# Altium PCB PCB1.PcbDoc
Units mil, origin at the board's own origin, x right, y up, seen from the top; angles counter-clockwise.
Board outline 5486 x 3258 mil, 2 copper layers (Top Layer, Bottom Layer); 90 components, 84 nets, 319 pads, 0 vias.
Unrouted connection lines stored in the file: 3.
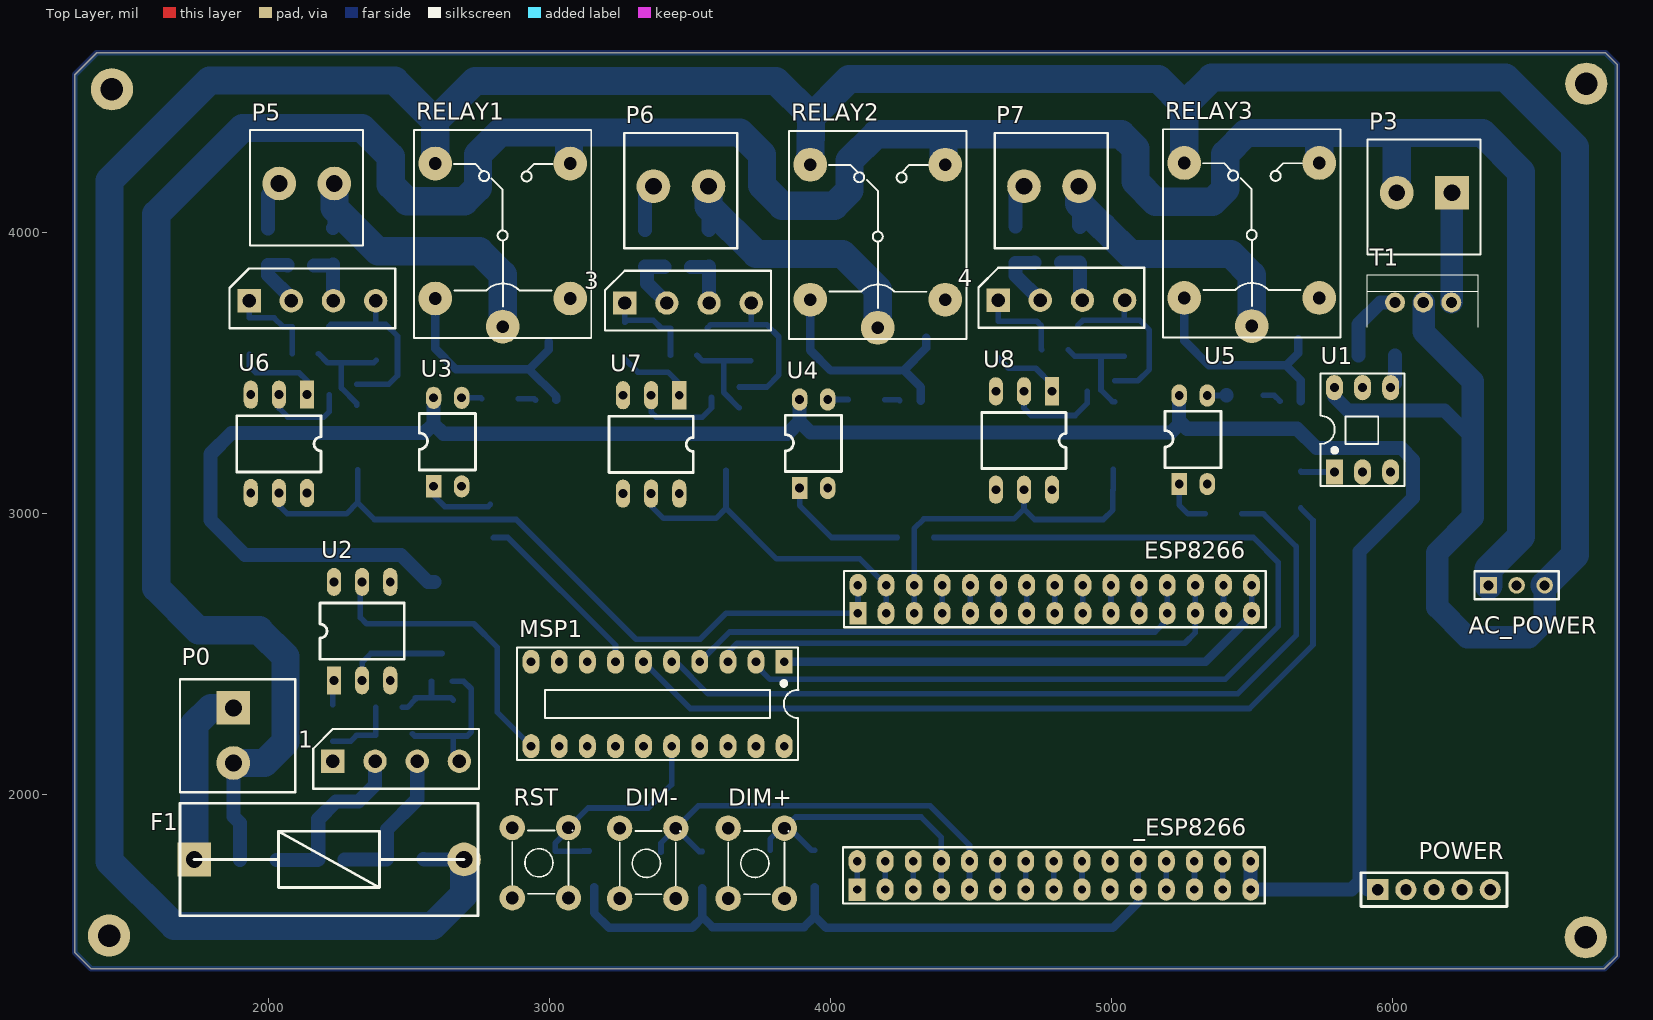
[diagram p0: Top Layer view]
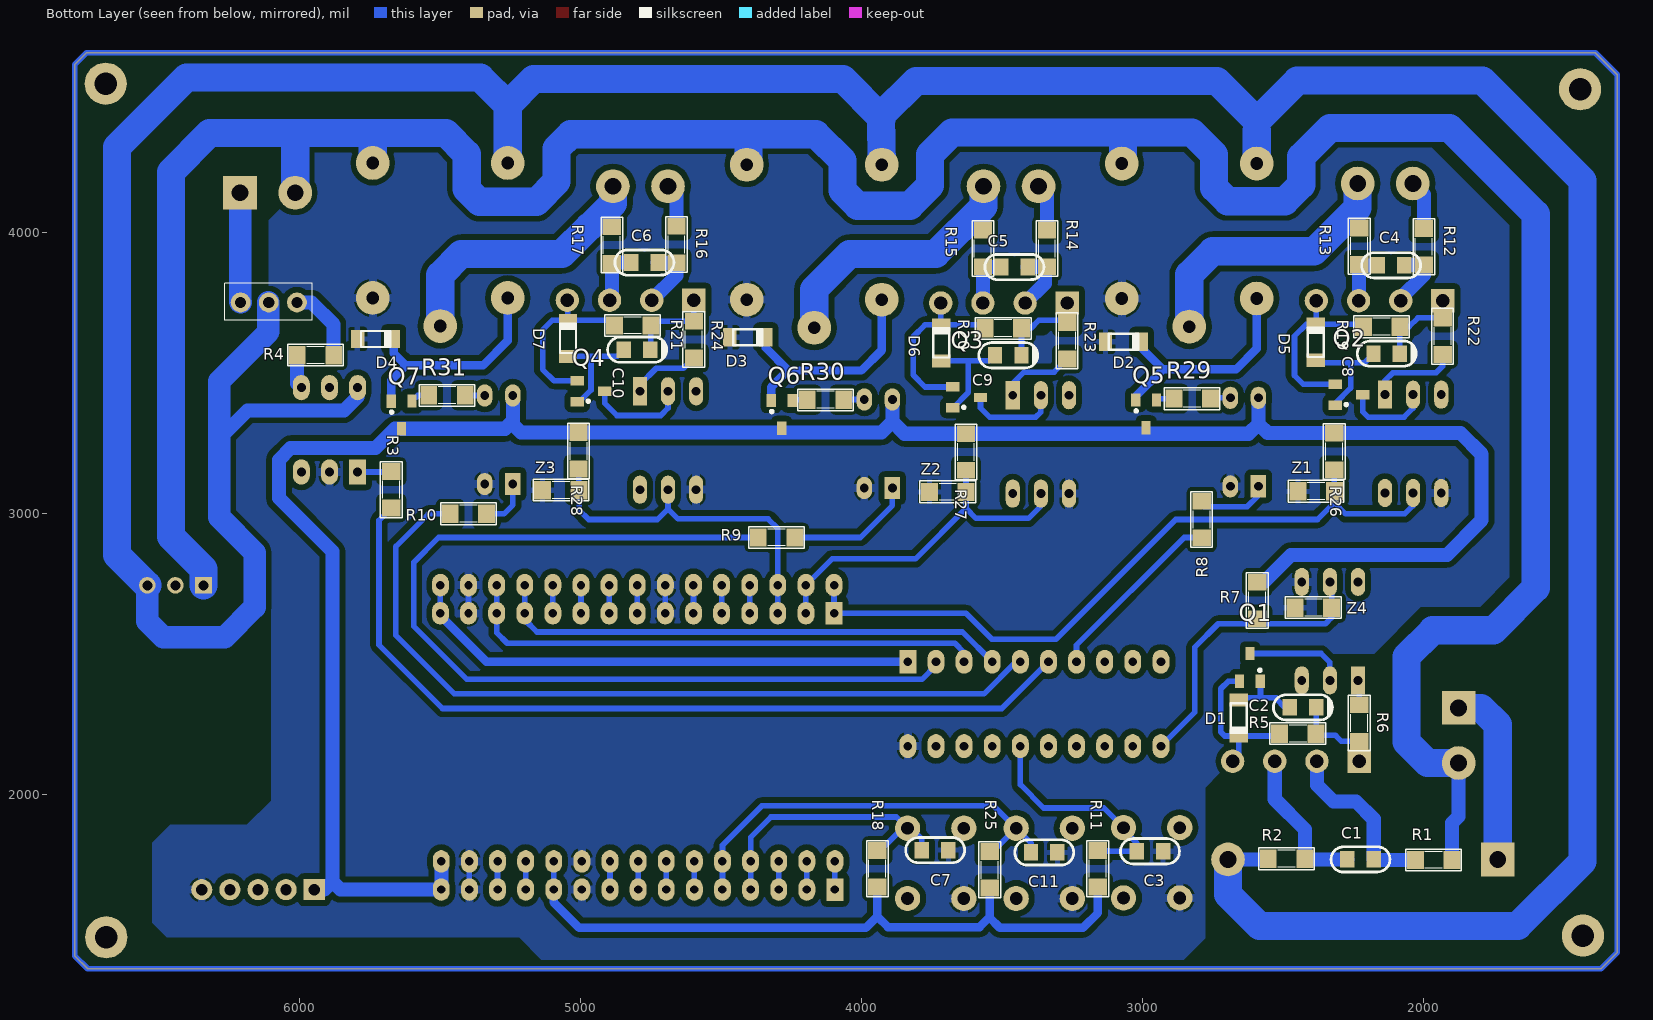
[diagram p1: Bottom Layer view, seen from below]
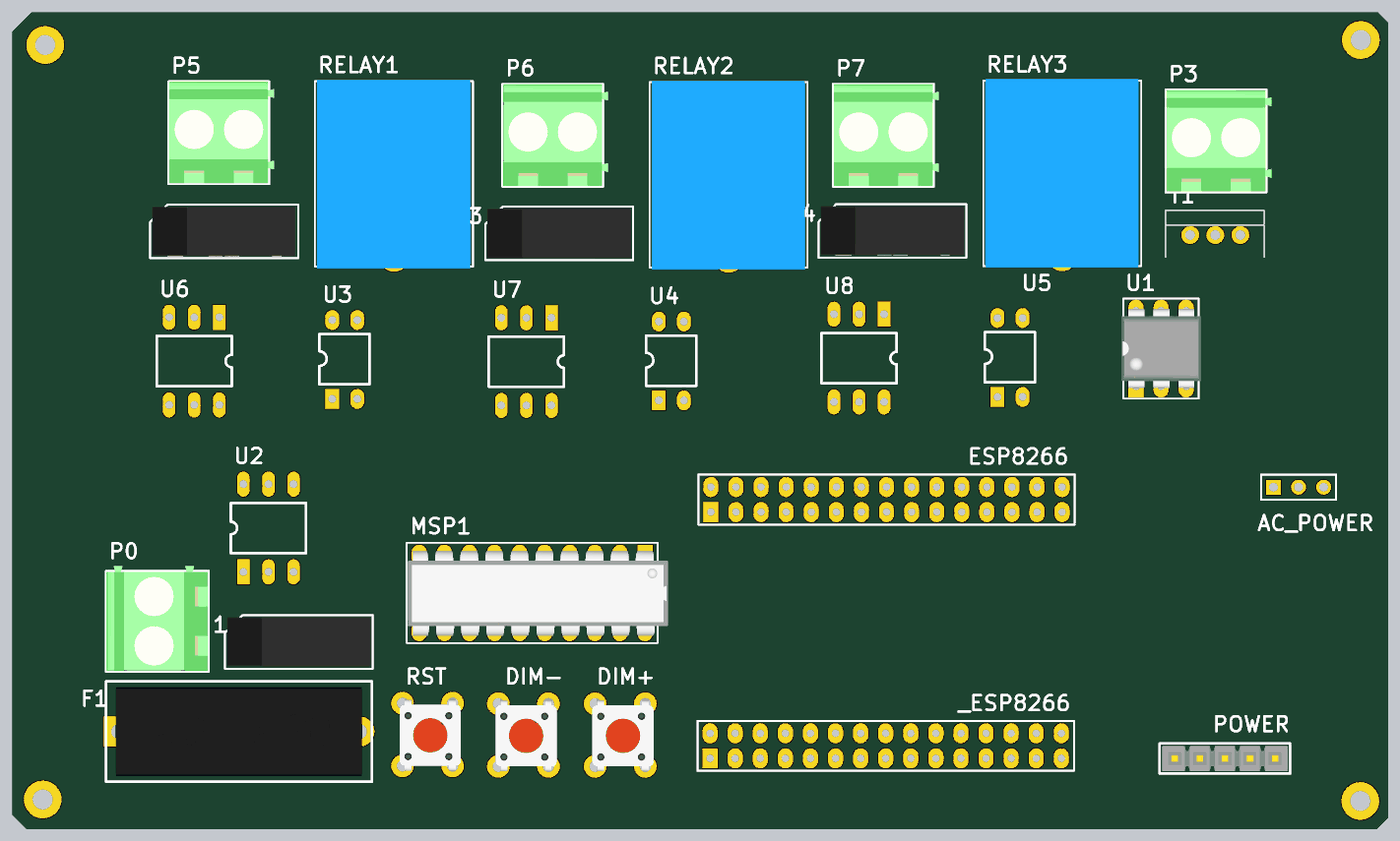
[diagram p2: 3D render of the assembled board from above, using the file's embedded part models]
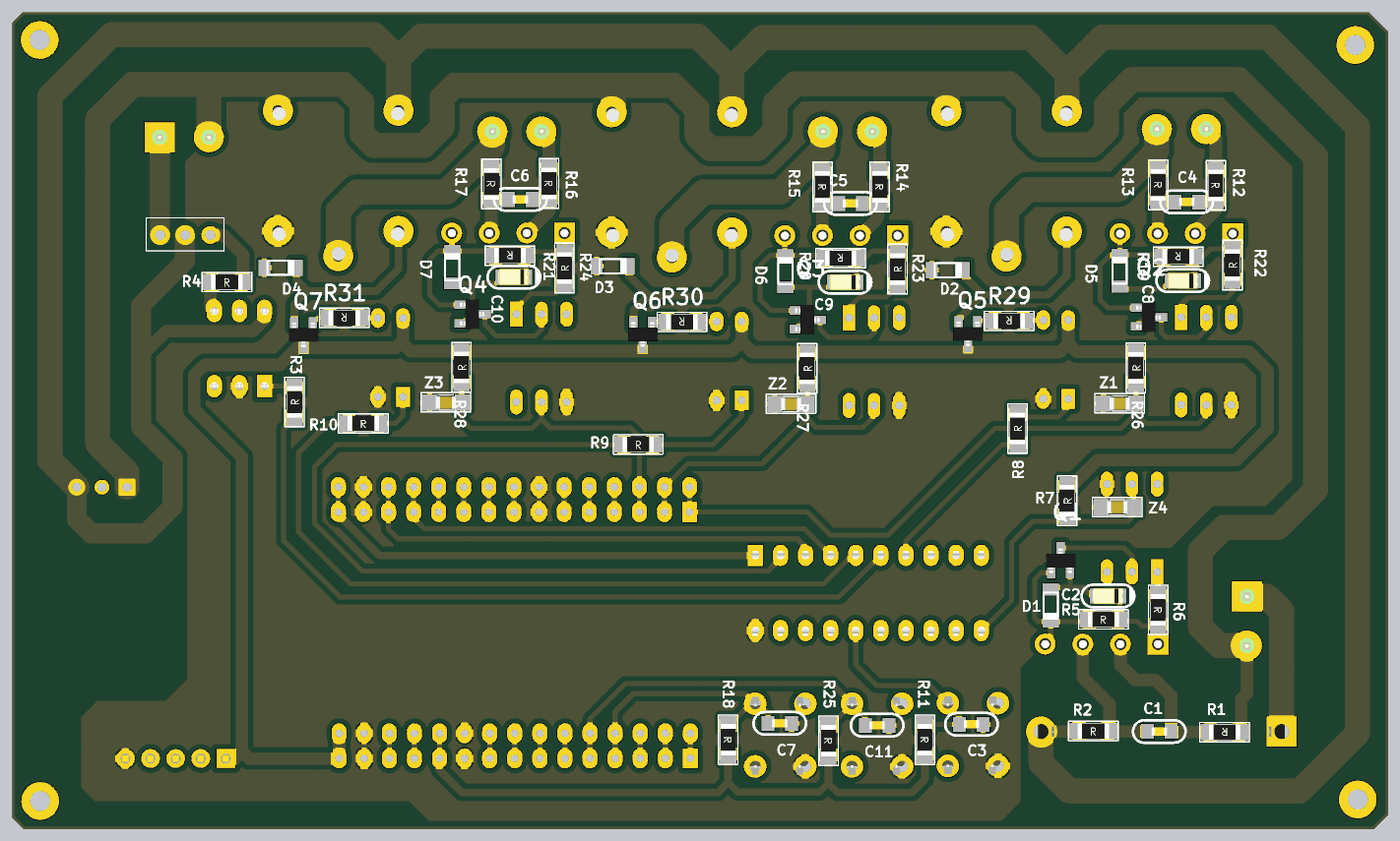
[diagram p3: 3D render of the assembled board from below, using the file's embedded part models]

## Layer stack, top to bottom
Top Solder: solder mask 0.4, Solder Resist, Dk 3.5
Top Layer: signal copper 1.4
Dielectric 1: dielectric 12.6, FR-4, Dk 4.8
Bottom Layer: signal copper 1.4
Bottom Solder: solder mask 0.4, Solder Resist, Dk 3.5

## Board outline
1370,1380 1312,1438 1312,4560 1390,4638 6756,4638 6798,4596 6798,1426 6752,1380

## Design rules (kind name [scope] priority, off if disabled: settings)
Clearance [All] p1: gap=10 ignorepadtopadclearanceinfootprint=FALSE except(20: Arc-Poly Arc-Region Track-Poly Track-Region SMDPad-Poly SMDPad-Region THPad-Poly THPad-Region Via-Poly Via-Region Fill-Poly Fill-Region Poly-Poly Poly-Region Region-Region)
PlaneConnect [All] p1: planeconnectstyle=Relief reliefexpansion=20 reliefentries=4 reliefconductorwidth=20 reliefairgap=5
PolygonConnect [All] p1: thpad.connectstyle=Relief thpad.reliefconductorwidth=30 thpad.reliefentries=4 thpad.polygonreliefangle="90 Angle" thpad.airgapwidth=8 smdpad.connectstyle=Relief smdpad.reliefconductorwidth=20 smdpad.reliefentries=4 smdpad.polygonreliefangle="90 Angle" smdpad.airgapwidth=10 via.connectstyle=Relief via.reliefconductorwidth=50 via.reliefentries=4 via.polygonreliefangle="90 Angle" via.airgapwidth=8
RoutingVias [All] p1: holewidth=50 width=100 viastyle="Through Hole" minholewidth=24 minwidth=40 maxholewidth=28 maxwidth=40
SolderMaskExpansion [All] p1: expansion=4
Width [All] p1: maxlimit=100 minlimit=15 preferedwidth=20 minimp=50.000000 maximp=50.000000 favimp=50.000000
29 further rules are at their usual default settings.

## Components (designator, comment, footprint, x,y, rotation, side; value= is the part's Value field where it differs from the comment)
1 "Diode Bridge" "DIODE BRIDGE (1A)" 2230,2118 r0 top
3 "Diode Bridge" "DIODE BRIDGE (1A)" 3268,3748 r0 top
4 "Diode Bridge" "DIODE BRIDGE (1A)" 4596,3758 r0 top
_ESP8266 "Header 15X2A" HDR2X15_CEN 4097.51,2644.63 r0 top
AC_POWER "Header 3_1" HDR1X3 6340,2744 r0 top
C1 "Cap Non-pol" C-NP-0805 2225,1769 r180 bottom value=1nF
C2 "Cap Pol" C-P-0805 2430,2310 r0 bottom value=10uF
C3 "Cap Non-pol" C-NP-0805 2974,1798 r0 bottom value=100uF
C4 "Cap Non-pol" C-NP-0805 2116,3882 r180 bottom value=1nF
C5 "Cap Non-pol" C-NP-0805 3456,3876 r180 bottom value=1nF
C6 "Cap Non-pol" C-NP-0805 4772,3892 r180 bottom value=1nF
C7 "Cap Non-pol" C-NP-0805 3738,1802 r0 bottom value=100uF
C8 "Cap Pol" C-P-0805 2132,3568 r0 bottom value=10uF
C9 "Cap Pol" C-P-0805 3478,3562 r0 bottom value=10uF
C10 "Cap Pol" C-P-0805 4798,3582 r0 bottom value=10uF
C11 "Cap Non-pol" C-NP-0805 3350,1794 r0 bottom value=100uF
D1 "Diode 1N4148" SOD80 2658,2272 r270 bottom
D2 "Diode" SOD80 3068,3610 r180 bottom value=FRxxx
D3 "Diode" SOD80 4404,3626 r180 bottom value=FRxxx
D4 "Diode" SOD80 5728,3620 r180 bottom value=FRxxx
D5 "Diode 1N4148" SOD80 2384,3608 r90 bottom
D6 "Diode 1N4148" SOD80 3716,3606 r90 bottom
D7 "Diode 1N4148" SOD80 5044,3622 r90 bottom
DIM+ "SW" SW4 3636,1630 r90 top value="SW chip 2 pin"
DIM- "SW" SW4 3250,1630 r90 top value="SW chip 2 pin"
ESP8266 "Header 15X2A" HDR2X15_CEN 4094.36,1661.95 r0 top
F1 "Fuse 1" Fuse 1736.33,1769 r0 top
MSP1 "Zip 20" DIP20/W0.3 3835,2472 r180 top value="Gat 20 pin"
P0 "Header 2" "TBlock 2"#1 1876,2308 r270 top
P3 "Header 2" "TBlock 2"#1 6210,4140 r180 top
P5 "Header 2" "TBlock 2"#2 2235,4173 r180 top
P6 "Header 2" "TBlock 2"#2 3566,4163 r180 top
P7 "Header 2" "TBlock 2"#2 4884,4163 r180 top
POWER "Header 5" "Header 5" 5946.3,1661.32 r0 top
Q1 "C1815" SOT23B 2618,2452 r180 bottom
Q2 "C1815" SOT23B 2266,3422 r270 bottom
Q3 "C1815" SOT23B 3626,3412 r270 bottom
Q4 "C1815" SOT23B 4962,3434 r270 bottom
Q5 "C1815" SOT23B 2988,3354 r0 bottom
Q6 "C1815" SOT23B 4284,3352 r0 bottom
Q7 "C1815" SOT23B 5636,3350 r0 bottom
R1 "220K" SM-1206 1965,1767 r0 bottom value="R1/4W - 1K"
R2 "220K" SM-1206 2488,1771 r180 bottom value="R1/4W - 1K"
R3 "180" SM-1206 5672,3084 r90 bottom value="R1/4W - 1K"
R4 "470" SM-1206 5942,3562 r180 bottom value="R1/4W - 1K"
R5 "22k" SM-1206 2448,2216 r180 bottom value="R1/4W - 1K"
R6 "1K" SM-1206 2230,2254 r270 bottom value="R1/4W - 1K"
R7 "1K" SM-1206 2592,2690 r90 bottom value="R1/4W - 1K"
R8 "180" SM-1206 2790,2978 r90 bottom value="R1/4W - 1K"
R9 "180" SM-1206 4302,2914 r180 bottom value="R1/4W - 1K"
R10 "180" SM-1206 5398,2998 r180 bottom value="R1/4W - 1K"
R11 "1k" SM-1206 3160,1736 r270 bottom value="R1/4W - 1K"
R12 "220K" SM-1206 2000,3948 r270 bottom value="R1/4W - 1K"
R13 "220K" SM-1206 2230,3950 r270 bottom value="R1/4W - 1K"
R14 "220K" SM-1206 3340,3942 r270 bottom value="R1/4W - 1K"
R15 "220K" SM-1206 3568,3942 r270 bottom value="R1/4W - 1K"
R16 "220K" SM-1206 4658,3956 r270 bottom value="R1/4W - 1K"
R17 "220K" SM-1206 4888,3954 r270 bottom value="R1/4W - 1K"
R18 "1k" SM-1206 3944,1736 r270 bottom value="R1/4W - 1K"
R19 "22k" SM-1206 2150,3664 r0 bottom value="R1/4W - 1K"
R20 "22k" SM-1206 3496,3658 r0 bottom value="R1/4W - 1K"
R21 "22k" SM-1206 4814,3668 r0 bottom value="R1/4W - 1K"
R22 "1K" SM-1206 1933,3630 r90 bottom value="R1/4W - 1K"
R23 "1K" SM-1206 3268,3614 r90 bottom value="R1/4W - 1K"
R24 "1K" SM-1206 4596,3618 r90 bottom value="R1/4W - 1K"
R25 "1k" SM-1206 3544,1732 r270 bottom value="R1/4W - 1K"
R26 "1K" SM-1206 2318,3220 r90 bottom value="R1/4W - 1K"
R27 "1K" SM-1206 3628,3218 r90 bottom value="R1/4W - 1K"
R28 "1K" SM-1206 5006,3222 r90 bottom value="R1/4W - 1K"
R29 "180" SM-1206 2824,3408 r0 bottom value="R1/4W - 1K"
R30 "180" SM-1206 4128,3404 r0 bottom value="R1/4W - 1K"
R31 "180" SM-1206 5474,3420 r0 bottom value="R1/4W - 1K"
RELAY1 "Relay 10A/12V" RL_SPDT_10A 2834,3664 r90 top value="Relay SPDT, 10A, 12V"
RELAY2 "Relay 10A/12V" RL_SPDT_10A 4168,3660 r90 top value="Relay SPDT, 10A, 12V"
RELAY3 "Relay 10A/12V" RL_SPDT_10A 5498,3666 r90 top value="Relay SPDT, 10A, 12V"
RST "SW" SW4 2868,1632 r90 top value="SW chip 2 pin"
T1 "BTA16" TO-220 6008,3750 r270 top
U1 "MOC3021" DIP6/W0.3 5792,3147 r0 top
U2 "4N35" DIP6 2234,2406 r90 top
U3 "PC817" DIP4 2588,3096 r90 top
U4 "PC817" DIP4 3890,3090 r90 top
U5 "PC817" DIP4 5240,3104 r90 top
U6 "4N35" DIP6 2138,3422 r270 top
U7 "4N35" DIP6 3462,3420 r270 top
U8 "4N35" DIP6 4788,3434 r270 top
Z1 "BZG03C13" "SMD Capacistor 1206" 2483,3038 r180 bottom
Z2 "BZG03C13" "SMD Capacistor 1206" 3793,3036 r180 bottom
Z3 "BZG03C13" "SMD Capacistor 1206" 5169,3042 r180 bottom
Z4 "BZG03C13" "SMD Capacistor 1206" 2493,2624 r180 bottom
? "Diode Bridge" "DIODE BRIDGE (1A)" 1932,3756 r0 top

## Footprints (in the part's own frame and the unit in brackets; to place one, negate y for a bottom-side part, rotate by r counter-clockwise, add the part's x,y. Pads: shape width x height; smd on the part's side, far side on the other; paste and mask are expansions set on the pad)
C-NP-0805 [mm] "Chip Capacitor; Non-polarized; Body 2.0 x 1.3 mm (LxW typ) [2012]"
  rect 1.3x1.5 smd: 1(-1.194,0) 2(1.194,0)
  silkscreen extent -2.67,-1.14 2.66,1.14, body extent -0.8,-0.43 0.8,0.43, height 0.79
C-P-0805 [mm] "Chip Capacitor; Polarized; Body 2.0 x 1.3 mm (LxW typ) [2012]"
  rect 1.3x1.5 smd: 1(-1.194,0) 2(1.194,0)
  silkscreen extent -2.67,-1.14 2.66,1.14, body extent -1.6,-0.8 1.6,0.8, height 1.61
"DIODE BRIDGE (1A)" [mil] "Diode Bridge 1A; Solder Pad 35mil"
  rect 83x83 hole 48: 1(0,0)
  round 83 hole 48: 2(150,0) 3(300,0) 4(450,0)
  silkscreen extent -70,-98 520,115, body extent -62,-90 512,107, height 453
DIP4 [mm]
  rect 2x1.4 hole 0.8: 1(0,0)
  oval 2x1.4 hole 0.8: 2(0,-2.54) 3(8,-2.54) 4(8,0)
  silkscreen extent 1.48,-3.79 6.57,1.3, body extent -0.17,-3.72 8.19,1.34, height 5.4
DIP6 [mm]
  rect 2.54x1.27 hole 0.8: 1(0,0)
  oval 2.54x1.27 hole 0.8: 2(0,-2.54) 3(0,-5.08) 4(8.89,-5.08) 5(8.89,-2.54) 6(8.89,0)
  silkscreen extent 1.91,-6.35 6.98,1.27, body extent 0.03,-6.35 8.86,1.29, height 5.4
DIP6/W0.3 [mil] "6 PIN, W 300mil, Pin to pin 100mil"
  rect 60x90 hole 31.5: 1(0,0)
  oval 60x90 hole 31.5: 2(100,0) 3(200,0) 4(200,300) 5(100,300) 6(0,300)
  silkscreen extent -50,-50 250,350, body extent -58,-7 260,307, height 170
DIP20/W0.3 [mil] "DIP 20, 20 PIN, W 300mil, Pin to pin 100mil"
  rect 60x85 hole 31: 1(0,0)
  oval 60x85 hole 31: 2(100,0) 3(200,0) 4(300,0) 5(400,0) 6(500,0) 7(600,0) 8(700,0) 9(800,0) 10(900,0) 11(900,300) 12(800,300) 13(700,300) 14(600,300) 15(500,300) 16(400,300) 17(300,300) 18(200,300) 19(100,300) 20(0,300)
  silkscreen extent -50,-50 950,350, body extent -91,-18 945,322, height 155
Fuse [mil] "Fuse Box; 2 Leads; Solder Pad 35mil"
  rect 120x120 hole 60: 1(0.67,0)
  round 120 hole 60: 2(960,0)
  silkscreen extent -50,-200 1010,200, body extent -12,-177 972,177, height 81
HDR1X3 [mm] "Connector; Header; 3 Position"
  rect 1.5x1.5 hole 0.9: 1(0,0)
  round 1.5 hole 0.9: 2(2.54,0) 3(5.08,0)
  silkscreen extent -1.27,-1.27 6.35,1.27, body extent -1.27,-1.27 6.35,1.27, height 7
HDR2X15_CEN [mil]
  rect 60x80 hole 30: 1(0,0)
  oval 60x80 hole 30: 2(100,0) 3(200,0) 4(300,0) 5(400,0) 6(500,0) 7(600,0) 8(700,0) 9(800,0) 10(900,0) 11(1000,0) 12(1100,0) 13(1200,0) 14(1300,0) 15(1400,0) 16(0,100) 17(100,100) 18(200,100) 19(300,100) 20(400,100) 21(500,100) 22(600,100) 23(700,100) 24(800,100) 25(900,100) 26(1000,100) 27(1100,100) 28(1200,100) 29(1300,100) 30(1400,100)
  silkscreen extent -50,-50 1450,150
"Header 5" [mil] "Connector; Header; 5 Position; Solder Pad 35mil"
  rect 75x75 hole 40: 1(0,0)
  round 75 hole 40: 2(100,0) 3(200,0) 4(300,0) 5(400,0)
  silkscreen extent -60,-60 460,60, body extent -50,-50 450,50, height 83
RL_SPDT_10A [mil] "Relay SPDT, 5 pin, 10A,W 650mil, L 800mil, H 800mil"
  round 120 hole 45: 1(0,0) 2(580,240) 3(580,-240) 4(100,-240) 5(100,240)
  silkscreen extent -40,-315 700,315, body extent -46,-304 706,306, height 602
SM-1206 [mil] "Compoment SMD 120x60mil"
  rect 60x65 smd: 1(-65,0) 2(65,0)
  silkscreen extent -99,-38 99,39, body extent -83,-35 83,36, height 25
"SMD Capacistor 1206" [mil]
  rect 60x65 smd: 1(35,40) 2(165,40)
  silkscreen extent 1,2 199,79, body extent 60,15 140,65, height 24
SOD80 [mm] "4148-SOD80 Diode, 2-Leads, Body 3.4x1.4mm, IPC Medium Density"
  rect 1.2x1.65 smd: 1(-1.625,0) 2(1.625,0)
  silkscreen extent -1.33,-0.73 1.33,0.75, body extent -2,-0.9 2,0.9, height 1.89
SOT23B [mm] "SOT 23B"
  rect 0.85x1.2 smd: 1(0.94,-1.245) 2(0,1.25) 3(-0.95,-1.25)
  silkscreen extent 0.77,-0.38 1.02,-0.13, body extent -1.5,-1.3 1.5,1.2, height 1.06
SW4 [mil] "SW button 4pin, 250 x250 mil"
  round 90 hole 45: 1(0,0) 2(250,-200) 3(250,0) 4(0,-200)
  silkscreen extent 15,-215 240,0, body extent -34,-233 278,11, height 276
"TBlock 2"#1 [mil] "Connector; Terminal; 2 Positions; Solder Pad 35mil"
  rect 120x120 hole 60: 1(0,0)
  round 120 hole 60: 2(196,0)
  silkscreen extent -102,-190 300,220, body extent -122,-189 296,217, height 560
"TBlock 2"#2 [mil] "Connector; Terminal; 2 Positions; Solder Pad 35mil"
  round 120 hole 60: 1(0,0) 2(196,0)
  silkscreen extent -102,-190 300,220, body extent -122,-189 296,217, height 560
TO-220 [mm]
  round 1.8 hole 1: 1(0,0) 2(0,2.54) 3(0,5.08)
  silkscreen extent -2.5,-2.5 2.25,7.5, body extent -2.4,-2.45 2.1,7.45, height 19.7

## Part data
1 3 4 ?: "Full Wave Diode Bridge", LatestRevisionDate=17-Jul-2002, LatestRevisionNote="Re-released for DXP Platform.", PackageReference=D-38, Published=8-Jun-2000, Publisher="Altium Limited"
_ESP8266 ESP8266: "Header, 15-Pin, Dual row", LatestRevisionDate=17-Jul-2002, LatestRevisionNote="Re-released for DXP Platform.", Publisher="Altium Limited"
AC_POWER: "Header, 3-Pin", LatestRevisionDate=17-Jul-2002, LatestRevisionNote="Re-released for DXP Platform.", Publisher="Altium Limited"
C1 C3 C4 C5 C6 C7 C11: "Non-polarized Capacitor", LatestRevisionDate=17-Jul-2002, LatestRevisionNote="Re-released for DXP Platform.", PackageReference=RAD-0.3, Published=8-Jun-2000, Publisher="Altium Limited"
C2 C8 C9 C10: "Polarized Capacitor", LatestRevisionDate=17-Jul-2002, LatestRevisionNote="Re-released for DXP Platform.", PackageReference=POLAR0.8, Published=8-Jun-2000, Publisher="Altium Limited"
D1 D5 D6 D7: "High Conductance Fast Diode", Code_JEDEC=DO-204-AH, ComponentLink1Description="Manufacturer Link", ComponentLink1URL=http://www.fairchildsemi.com/, ComponentLink2Description=Datasheet, ComponentLink2URL=http://www.fairchildsemi.com/ds/1N%2F1N4148.pdf, DatasheetVersion=1997, LatestRevisionDate=17-Jul-2002, LatestRevisionNote="Re-released for DXP Platform.", PackageDescription="Diode, Axial; Body 3.8 x 1.9 mm (LxDia. max), Lead Dia. 0.53 mm (max)", PackageReference=DO-35, Published=8-Jun-2000, Publisher="Altium Limited"
DIM+ DIM- RST: library part SW2, "Switch button 2 pin"
F1: "Fuse", LatestRevisionDate=17-Jul-2002, LatestRevisionNote="Re-released for DXP Platform.", PackageReference=PIN-W2/E2.8, Published=8-Jun-2000, Publisher="Altium Limited"
MSP1: library part Zip20, "De 20 pin"
P0 P3 P5 P6 P7: "Header, 2-Pin", LatestRevisionDate=17-Jul-2002, LatestRevisionNote="Re-released for DXP Platform.", Publisher="Altium Limited"
POWER: "Header, 5-Pin", LatestRevisionDate=17-Jul-2002, LatestRevisionNote="Re-released for DXP Platform.", Publisher="Altium Limited"
Q1 Q2 Q3 Q4 Q5 Q6 Q7: library part C1815_1, "NPN 600mW, ECB", =C2383
R1 R2 R3 R4 R5 R6 R7 R8 R9 R10 R11 R12 R13 R14 R15 R16 R17 R18 R19 R20 R21 R22 R23 R24 R25 R26 R27 R28 R29 R30 R31: library part R, "Resistor 1/4W"
RELAY1 RELAY2 RELAY3: library part "Relay 1", "Relay SPDT,10A - 12VDC 5 Pin", ="Relay SPDT, 10A, 24V"
T1: "Triac", ComponentLink2Description="Open Datasheet", ComponentLink2URL=H:\LIBRARY\LIBRARY.Datasheet\
U1: "Single Opto"
U2 U3 U4 U5 U6 U7 U8: "Opto Couple", ComponentLink1Description="Digikey Part Link", ComponentLink2Description="Open Datasheet", Published=13-April-2009, Publisher="Hoang Nguyen", Vendor=Digikey
  U2 U6 U7 U8: ComponentLink2URL=H:\LIBRARY\LIBRARY.Datasheet\
  U3 U4 U5: ComponentLink2URL=H:\LIBRARY\LIBRARY.Datasheet\ds_PC817.pdf, Fc=80Khz
Z1 Z2 Z3 Z4: "Zener Diode, 6.2V, 5W", ComponentLink1Description="Digikey Part Link", ComponentLink2Description="Open Datasheet", ComponentLink2URL=H:\LIBRARY\LIBRARY.Datasheet\, DatasheetDocument="RevB, 21-Aug-2003", Published=5-Jan-2004, Publisher="Altium Limited", Vendor=Digikey
D2 D3 D4: Code_JEDEC=DO-204-AH, ComponentLink1Description="Digikey Part Link", ComponentLink1URL=http://www.fairchildsemi.com/, ComponentLink2Description="Open Datasheet", ComponentLink2URL=H:\LIBRARY\LIBRARY.Datasheet\ds26003.pdf, DatasheetDocument=1997, LatestRevisionDate=17-Jul-2002, LatestRevisionNote="Re-released for DXP Platform.", PackageReference=DO-35, Published=8-Jun-2000, Publisher="Altium Limited", Vendor=Digikey

## Free pads (board coordinates)
  round 150 hole 80: 4(1434,1498) 5(6686,1492) 6(6688,4528) 7(1444,4508)

## Nets (pads, with @x,y where several pads share a name; then routed paths per layer and width w, separated by ;. In a path a pad name is that pad's centre, name@x,y a point inside that pad or via, vN(x,y) a via of type N, cw(c..) or ccw(c..) an arc to the next point about the centre after c; other vN are vias at no path point)
+3.3V: _ESP8266.6 _ESP8266.15 _ESP8266.21 _ESP8266.30 ESP8266.11 ESP8266.26 MSP1.1 R11.2 R18.2 R25.2 | length 4457.6
  Top Layer w20: _ESP8266.30@5483.37,2744.63 _ESP8266.30
  Bottom Layer w20: _ESP8266.6 _ESP8266.21 ; ESP8266.11 ESP8266.26 ; _ESP8266.15 _ESP8266.30
  Bottom Layer w30: R11.2 3159,1670 3159,1579 3212,1526 3508,1526 3544,1562 ; R25.2 3544,1562 ; MSP1.1 5334,2472 5497.51,2635.51 _ESP8266.15 ; R18.2 3944,1566 ; ESP8266.11 5094.36,1616.36 5004,1526 3984,1526 3944,1566 ; 3544,1562 3546,1562 3580,1528 3906,1528 3944,1566
+5V: ESP8266.15 ESP8266.30 POWER.1 Q5.2 Q6.2 Q7.2 R7.2 R26.2 R27.2 R28.2 U3.4 U4.4 U5.4 | length 7989.9
  Bottom Layer w50: U3.4 2588,3318 ; R7.2 2569,2755 2472,2852 1918,2852 1794,2976 1794,3210 1869,3285 R26.2 2555,3285 2588,3318 ; U4.4 3890,3326 ; U5.4 5240,3328 5246,3322 ; ESP8266.30 ESP8266.15 5494.99,1661.32 5853.32,1661.32 5882,1690 ; POWER.1 5910.68,1661.32 5882,1690 ; 2588,3318 2623,3283 R27.2 3847,3283 3890,3326 ; 3890,3326 3929,3287 R28.2 5211,3287 5246,3322 ; 5246,3322 5267.21,3300.79 Q7.2 5659.21,3300.79 5728,3232 6030,3232 6072,3190 6072,3054 5882,2864 5882,1690
A0: ESP8266.1 ESP8266.16 | length 100
  Bottom Layer w20: ESP8266.1 ESP8266.16
CLK: ESP8266.9 ESP8266.24 | length 100
  Bottom Layer w20: ESP8266.9 ESP8266.24
CMD: ESP8266.7 ESP8266.22 | length 100
  Bottom Layer w20: ESP8266.7 ESP8266.22
D3: _ESP8266.4 _ESP8266.19 | length 100
  Bottom Layer w20: _ESP8266.4 _ESP8266.19
D4: _ESP8266.5 _ESP8266.20 | length 100
  Bottom Layer w20: _ESP8266.5 _ESP8266.20
D5: _ESP8266.8 _ESP8266.23 | length 100
  Bottom Layer w20: _ESP8266.8 _ESP8266.23
D6: _ESP8266.9 _ESP8266.24 | length 100
  Bottom Layer w20: _ESP8266.9 _ESP8266.24
D7: _ESP8266.10 _ESP8266.25 | length 100
  Bottom Layer w20: _ESP8266.10 _ESP8266.25
D8: _ESP8266.11 _ESP8266.26 | length 100
  Bottom Layer w20: _ESP8266.11 _ESP8266.26
DIM: MSP1.6 R3.1 | length 3048.6
  Bottom Layer w20: MSP1.6 3501,2306 5490,2306 5716,2532 5716,2975 R3.1
EN: ESP8266.12 ESP8266.27 | length 100
  Bottom Layer w20: ESP8266.12 ESP8266.27
GND: _ESP8266.7 _ESP8266.14 _ESP8266.22 _ESP8266.29 C3.1 C7.1 C11.1 D2.1 D3.1 D4.1 DIM+.1 DIM-.1 ESP8266.10 ESP8266.14 ESP8266.25 ESP8266.29 MSP1.20 POWER.5 RELAY1.4 RELAY2.4 RELAY3.4 RST.1 U1.2 U2.4 U3.2 U4.2 U5.2 U6.4 U7.4 U8.4 Z1.1 Z2.1 Z3.1 Z4.1 | length 304.5
  Top Layer w20: ESP8266.29 ESP8266.29@5397.51,1765.1
  Bottom Layer w20: _ESP8266.7 _ESP8266.22 ; ESP8266.14 ESP8266.29 ; _ESP8266.14 _ESP8266.29
L: AC_POWER.3 F1.2 R2.1 RELAY1.2 RELAY2.2 RELAY3.2 T1.2 U1.6 | length 14336.8
  Bottom Layer w50: R2.1 2555,1769 F1.2 ; U1.6 5792,3414 5840,3366 6184,3366 6284,3266
  Bottom Layer w80: T1.2@6109,3750 6109,3645 6284,3470 6284,3266 6284,2986 6158,2860 6158,2666 6264,2560 6484,2560 6540,2616 AC_POWER.3
  Bottom Layer w100: RELAY1.2 2594,4362 ; F1.2 2696.33,1644.33 2584,1532 1666,1532 1436,1762 1436,4184 1792,4540 2450,4540 2594,4396 2736,4538 3806,4538 3928,4416 3928,4406 3930,4408 ; RELAY2.2 3930,4408 ; RELAY3.2 5258,4452 ; AC_POWER.3 6648,2852 6648,4302 6400,4550 5356,4550 5258,4452 ; 3930,4408 4066,4544 5166,4544 5258,4452
N: AC_POWER.1 P0.2 P3.2 R1.1 RELAY1.3 RELAY2.3 RELAY3.3 | length 10875.3
  Bottom Layer w50: P0.2 1876,1921 1899,1898 1899,1768 R1.1
  Bottom Layer w100: P0.2 1987,2112 2061,2186 2061,2491 1968,2584 1752,2584 1602,2734 1602,4064 1908,4370 2334,4370 2436,4268 2436,4168 2494,4110 2698,4110 2746,4158 2746,4276 2824,4354 3070,4354 ; RELAY1.3 3070,4248 3070,4354 ; 4402,4338 4402,4246 RELAY2.3 RELAY2.3@4417,4240 ; RELAY3.3 5738,4350 5736,4352 ; P3.2 6014,4348 ; AC_POWER.1 6340,2802 6456,2918 6456,4214 6318,4352 5736,4352 ; 3070,4354 3678,4354 3756,4276 3756,4166 3828,4094 4014,4094 4068,4148 4068,4254 4162,4348 5034,4348 5084,4298 5084,4180 5156,4108 5358,4108 5404,4154 5404,4278 5478,4352 5736,4352
Net1_1: 1.1 C2.1 R5.2 R6.2 | length 261.7
  Bottom Layer w20: R6.2 2293,2189 2314,2210 2383,2210 R5.2 C2.1
Net1_2: 1.2 C1.2 R1.2 | length 628.4
  Bottom Layer w15: C1.2@2176,1767 C1.2
  Bottom Layer w50: R1.2 C1.2@2176,1767 ; C1.2 2178,1912 2241,1975 2321,1975 2380,2034 1.2
Net1_3: 1.3 C1.1 R2.2 | length 543.1
  Bottom Layer w50: C1.1 2421,1769 R2.2 2423,1876 2530,1983 1.3
Net1_4: 1.4 D1.2 Q1.3 R5.1 | length 548.9
  Bottom Layer w20: R5.1 2520.98,2208.02 D1.2 ; Q1.3 2695.21,2402.79 2722,2376 2722,2222 2708.02,2208.02 D1.2 ; 1.4 2658,2140 D1.2
Net3_1: 3.1 C9.1 R20.1 R23.2 | length 342.5
  Bottom Layer w20: 3.1 R23.2 3275,3686 3370,3686 3398,3658 R20.1 C9.1
Net3_2: 3.2 C5.2 R14.2 | length 226.4
  Bottom Layer w50: R14.2 3408,3877 C5.2 ; R14.2@3348,3876 3348,3818 3.2
Net3_3: 3.3 C5.1 R15.2 | length 194.4
  Bottom Layer w50: C5.1 R15.2@3567,3876 ; 3.3 3568,3876 R15.2@3567,3876 ; R15.2 R15.2@3567,3876
Net3_4: 3.4 D6.2 Q3.3 R20.2 | length 650.6
  Bottom Layer w20: R20.2 3572.98,3669.98 D6.2 ; Q3.3 3773.4,3449.4 3816,3492 3816,3628 3774.02,3669.98 D6.2 ; 3.4 3718,3671.98 D6.2
Net4_1: 4.1 C10.1 R21.1 R24.2 | length 321
  Bottom Layer w20: 4.1 R24.2 4734,3683 R21.1 4749,3584 C10.1
Net4_2: 4.2 C6.2 R16.2 | length 236.9
  Bottom Layer w50: C6.2 4724,3891 R16.2 4658,3846 4.2
Net4_3: 4.3 C6.1 R17.2 | length 204.6
  Bottom Layer w50: C6.1 4885,3892 R17.2 4888,3766 4.3
Net4_4: 4.4 D7.2 Q4.3 R21.2 | length 629
  Bottom Layer w20: R21.2 4896.98,3685.98 D7.2 ; Q4.3 5093.4,3471.4 5134,3512 5134,3652 5100.02,3685.98 D7.2 ; 4.4 5044,3756 D7.2
Net_1: ?.1 C8.1 R19.1 R22.2 | length 317.3
  Bottom Layer w20: ?.1 1932,3696 R22.2 2021,3695 2052,3664 R19.1 ; C8.1 R19.1@2085,3659
Net_2: ?.2 C4.2 R12.2 | length 230.4
  Bottom Layer w50: C4.2 2068,3883 R12.2 2000,3848 2082,3766 ?.2
Net_3: ?.3 C4.1 R13.2 | length 198.1
  Bottom Layer w50: C4.1 2227,3882 R13.2 2230,3758 ?.3
Net_4: ?.4 D5.2 Q2.3 R19.2 | length 648
  Bottom Layer w20: R19.2 2222.98,3671.98 D5.2 ; Q2.3 2429.4,3459.4 2460,3490 2460,3630 2418.02,3671.98 D5.2 ; ?.4 2382,3673.98 D5.2
NetC2_2: C2.2 D1.1 Q1.1 | length 255.3
  Bottom Layer w20: C2.2 2495,2310 2524,2339 ; 2524,2343.98 2581,2343.98 ; Q1.1 2581,2343.98 ; D1.1 2650,2343.98 2581,2343.98
NetC8_2: C8.2 D5.1 Q2.1 | length 395
  Bottom Layer w20: C8.2 2212,3535 2260.41,3535 ; Q2.1 2315,3390.98 2260.41,3445.57 2260.41,3535 ; D5.1 2374.98,3535 2260.41,3535
NetC9_2: C9.2 D6.1 Q3.1 | length 389.1
  Bottom Layer w20: C9.2 3544.98,3542.02 3620,3542.02 ; Q3.1 3620.41,3429.59 3620.41,3437.43 3620,3437.83 3620,3542.02 ; D6.1 3620,3542.02
NetC10_2: C10.2 D7.1 Q4.1 | length 394.9
  Bottom Layer w20: C10.2 4868.98,3558.02 4962,3558.02 ; Q4.1 5003,3397 4962,3438 4962,3558.02 ; D7.1 4962,3558.02
NetD2_2: D2.2 Q5.1 RELAY1.5 | length 818.8
  Bottom Layer w30: RELAY1.5 2594,3586 2668,3512 2928,3512 ; D2.2@2998,3610 2998,3582 2928,3512 ; Q5.1 3025,3415 2928,3512
NetD3_2: D3.2 Q6.1 RELAY2.5 | length 810.4
  Bottom Layer w30: RELAY2.5 3928,3580 4000,3508 4248,3508 ; Q6.1 4321,3449 4261,3509 4340.02,3588.02 D3.2@4340.02,3624
NetD4_2: D4.2 Q7.1 RELAY3.5 | length 811.6
  Bottom Layer w30: RELAY3.5 5258,3614 5346,3526 5620,3526 ; D4.2 5664.02,3570.02 5620,3526 ; Q7.1 5673,3473 5620,3526
NetF1_1: F1.1 P0.1 | length 643.4
  Bottom Layer w100: F1.1 1737,2249 1796,2308 P0.1
NetP3_1: P3.1 T1.3 | length 390.8
  Bottom Layer w80: T1.3 6210,3752 P3.1
NetP5_1: P5.1 R13.1 RELAY1.1 | length 1026.7
  Bottom Layer w50: R13.1 2236,4021 2236,4086
  Bottom Layer w100: P5.1@2236,4158 2236,4086 2390,3932 2751,3932 2834,3849 RELAY1.1
NetP5_2: P5.2 R12.1 | length 176.2
  Bottom Layer w50: R12.1 2000,4134 P5.2
NetP6_1: P6.1 R15.1 RELAY2.1 | length 1017.4
  Bottom Layer w50: 3566,4092 3566,4009 R15.1
  Bottom Layer w100: P6.1 3566,4092 3736,3922 4042,3922 4168,3796 RELAY2.1
NetP6_2: P6.2 R14.1 | length 168.4
  Bottom Layer w50: R14.1 3340,4133 P6.2
NetP7_1: P7.1 R17.1 RELAY3.1 | length 1046.9
  Bottom Layer w50: 4884,4102 4884,4023 R17.1
  Bottom Layer w100: P7.1 4884,4102 4967,4019 4969,4019 5066,3922 5424,3922 5498,3848 RELAY3.1
NetP7_2: P7.2 R16.1 | length 154.4
  Bottom Layer w50: R16.1 4658,4133 P7.2
NetQ1_2: Q1.2 U2.2 | length 360.9
  Bottom Layer w20: U2.2 2334,2470 2365.21,2501.21 Q1.2
NetQ2_2: Q2.2 U6.2 | length 309
  Bottom Layer w20: U6.2 2038,3374 2070,3342 2198,3342 2216.79,3360.79 Q2.2
NetQ3_2: Q3.2 U7.2 | length 333
  Bottom Layer w20: U7.2 3362,3360 3380,3342 3544,3342 3576.79,3374.79 Q3.2
NetQ4_2: Q4.2 U8.2 | length 356.5
  Bottom Layer w20: U8.2 4688,3374 4714,3348 4870,3348 4912.79,3390.79 Q4.2
NetQ5_3: Q5.3 R29.2 | length 63.6
  Bottom Layer w20: R29.2 2945.81,3408 Q5.3
NetQ6_3: Q6.3 R30.2 | length 54.8
  Bottom Layer w20: R30.2 4243.81,3404 Q6.3
NetQ7_3: Q7.3 R31.2 | length 68.2
  Bottom Layer w20: R31.2 5577.81,3420 Q7.3
NetR3_2: R3.2 U1.1 | length 120.8
  Bottom Layer w20: R3.2 5674,3147 U1.1
NetR4_1: R4.1 U1.4 | length 121.2
  Bottom Layer w50: U1.4 6007,3462 R4.1
NetR4_2: R4.2 T1.1 | length 272.7
  Bottom Layer w50: R4.2 5877,3671 5956,3750 T1.1
NetR6_1: R6.1 U2.1 | length 94.3
  Bottom Layer w20: R6.1 2230,2402 U2.1 ; U2.1@2230,2418 U2.1@2234,2422
NetR8_2: R8.2 U3.1 | length 253.9
  Bottom Layer w20: U3.1 2588,3064 2628,3024 2782,3024 R8.2@2790,3032
NetR9_2: R9.2 U4.1 | length 456.2
  Bottom Layer w20: U4.1 3890,3028 4004,2914 R9.2
NetR10_2: R10.2 U5.1 | length 180.3
  Bottom Layer w20: U5.1 5240,3030 5272,2998 R10.2
NetR22_1: R22.1 U6.1 | length 318.1
  Bottom Layer w20: R22.1 1933,3523 1956,3500 2110,3500 2138,3472 U6.1
NetR23_1: R23.1 U7.1 | length 272
  Bottom Layer w20: R23.1 3315,3502 3422,3502 3462,3462 U7.1
NetR24_1: R24.1 U8.1 | length 255.4
  Bottom Layer w20: R24.1 4633,3516 4730,3516 4788,3458 U8.1
NetR29_1: R29.1 U3.3 | length 72.2
  Bottom Layer w20: U3.3 2756.04,3410.96 R29.1
NetR30_1: R30.1 U4.3 | length 73.4
  Bottom Layer w20: U4.3 4062.04,3404.96 R30.1
NetR31_1: R31.1 U5.3 | length 69.4
  Bottom Layer w20: U5.3 R31.1@5407.96,3418.96
  Bottom Layer w50: R31.1@5407.96,3418.96 R31.1
OUT1: MSP1.7 R8.1 | length 652.1
  Bottom Layer w20: R8.1@2801,2913 2802,2914 2852,2914 3235,2531 MSP1.7
OUT2: MSP1.2 R9.1 | length 3457.7
  Bottom Layer w20: MSP1.2 3735,2459.5 3785,2409.5 5403.5,2409.5 5592,2598 5592,2826 5504,2914 R9.1
OUT3: MSP1.5 R10.1 | length 2911.4
  Bottom Layer w20: MSP1.5 3450,2472 3564,2358 5448,2358 5656,2566 5656,2882 5540,2998 R10.1
RESET: ESP8266.13 ESP8266.28 | length 100
  Bottom Layer w20: ESP8266.13 ESP8266.28
RST: C3.2 MSP1.16 R11.1 RST.2 | length 792.3
  Bottom Layer w20: R11.1@3142,1799 3121,1799 3120,1798 C3.2 3021,1827 3068,1874 RST.2 3138,1952 3352,1952 3435,2035 MSP1.16
RSV: ESP8266.2 ESP8266.17 | length 100
  Bottom Layer w20: ESP8266.2 ESP8266.17
RSV1: ESP8266.3 ESP8266.18 | length 100
  Bottom Layer w20: ESP8266.3 ESP8266.18
RX: _ESP8266.12 _ESP8266.27 MSP1.4 | length 1847.6
  Bottom Layer w20: MSP1.4 3641,2578 5154,2578 5197.51,2621.51 _ESP8266.12 _ESP8266.27
SD0: ESP8266.8 ESP8266.23 | length 100
  Bottom Layer w20: ESP8266.8 ESP8266.23
SD1: ESP8266.6 ESP8266.21 | length 100
  Bottom Layer w20: ESP8266.6 ESP8266.21
STATUS0: MSP1.11 R7.1 U2.5 Z4.2 | length 1061.1
  Bottom Layer w20: U2.5 2328,2750 Z4.2 2328,2629 2350,2607 2731,2607 2814,2524 2814,2293 MSP1.11
STATUS1: _ESP8266.1 _ESP8266.16 R26.1 U6.5 Z1.2 | length 2589.2
  Bottom Layer w20: U6.5 2038,3028 2068,2998 2278,2998 2318,3038 ; R26.1 Z1.2 2318,3038 ; _ESP8266.16 _ESP8266.1 3628.63,2644.63 3536,2552 3308,2552 2882,2978 2378,2978 2318,3038
STATUS2: _ESP8266.2 _ESP8266.17 R27.1 U7.5 Z2.2 | length 1260.9
  Bottom Layer w20: U7.5 3362,3026 3406,2982 3592,2982 3628,3018 ; R27.1 Z2.2 3628,3018 ; _ESP8266.2 _ESP8266.17 4104.14,2838 3808,2838 3628,3018
STATUS3: _ESP8266.3 _ESP8266.18 R28.1 U8.5 Z3.2 | length 1283
  Bottom Layer w20: _ESP8266.3 _ESP8266.18 4297.51,2945.51 4332,2980 4652,2980 4688,3016 ; U8.5@4684,3080 U8.5 4688,3016 ; Z3.2 5004,3012 4970,2978 4726,2978 4688,3016 ; Z3.2@5006,3084 R28.1
SW1: C7.2 DIM+.2 ESP8266.4 ESP8266.19 R18.1 | length 1037.5
  Bottom Layer w20: C7.2 3785,1841 3824,1880 DIM+.2 ; R18.1 3933,1801 3854,1880 DIM+.2 ; ESP8266.4 ESP8266.19 4394.36,1847.64 4322,1920 3876,1920 DIM+.2
SW2: C11.2 DIM-.2 ESP8266.5 ESP8266.20 R25.1 | length 1529.7
  Bottom Layer w20: C11.2 3397,1827 DIM-.2 ; R25.1 3533,1797 DIM-.2 ; ESP8266.5 ESP8266.20 4494.36,1819.64 4354,1960 3530,1960 DIM-.2
TX: _ESP8266.13 _ESP8266.28 MSP1.3 | length 1893.8
  Bottom Layer w20: MSP1.3 3635,2505 3668,2538 5260,2538 5297.51,2575.51 _ESP8266.13 _ESP8266.28
pads on no net: AC_POWER.2 DIM+.3 DIM+.4 DIM-.3 DIM-.4 MSP1.8 MSP1.9 MSP1.10 MSP1.12 MSP1.13 MSP1.14 MSP1.15 MSP1.17 MSP1.18 MSP1.19 POWER.2 POWER.3 POWER.4 RST.3 RST.4 U1.3 U1.5 U2.3 U2.6 U6.3 U6.6 U7.3 U7.6 U8.3 U8.6
copper on no net: | length 17356.8
  Bottom Layer w20: 1312,1438 1312,4560 1390,4638 6756,4638 6798,4596 6798,1426 6752,1380 1370,1380 1312,1438

## Polygon pours and split planes (outlines as drawn)
GND on Bottom Layer "GND" (solid, remove dead copper, pour order 20): 2332,4388 2376,4344 6034,4344 6034,4128 6028,4122 6108,4042 6108,3644 6290,3462 6284,3456 6284,2998 6242,2998 6098,2854 6100,2852 6100,1978 6186,1892 6458,1892 6522,1828 6522,1544 6470,1492 5218,1492 5138,1412 2854,1412 2778,1488 2778,2024 2655.4,2146.6 2655.4,2463.81 2618,2501.21 2176.79,2501.21 2010,2668 1800,2668 1696,2772 1696,4024 2052,4380 2092,4380